# EAGLE board wings20 (EAGLE 6.4)

Size 100 x 80 mm. Coordinates in mm from the lower left corner, seen from the top.
Outline: 0,0 100,0 100,80 0,80 0,0
Copper layers (1*16): Top 0.035mm / dielectric 1.5mm / Bottom 0.035mm
Design rules "default": minimum track width 10mil, minimum drill 24mil, track to track 8mil, track to pad 8mil, pad to pad 8mil, via to via 8mil, smd to smd 8mil, copper to edge 40mil, drill to drill 8mil, minimum pad ring 10mil, minimum via ring 8mil, stop-mask expansion 4mil, vias tented up to drill 0mil, thermal gap 10mil

## Footprints (pad centres in the part's own frame; a part is rotated, then mirrored left to right if it is on the bottom)
1X04-3.5MM = drill 1 pad 2.184: 1 -5.25,0; 2 -1.75,0; 3 1.75,0; 4 5.25,0
1X2-3.5MM = drill 1 pad 2.184: 1 1.8,0; 2 -1.7,0
1X06-3.5MM = drill 1 pad 2.184: 1 -8.75,0; 2 -5.25,0; 3 -1.75,0; 4 1.75,0; 5 5.25,0; 6 8.75,0
1X06-CLEANBIG = drill 1.016 pad 1.778 octagon: 1 -6.35,0; 2 -3.81,0; 3 -1.27,0; 4 1.27,0; 5 3.81,0; 6 6.35,0
1X08-CLEANBIG = drill 1.016 pad 1.778 octagon: 1 -8.89,0; 2 -6.35,0; 3 -3.81,0; 4 -1.27,0; 5 1.27,0; 6 3.81,0; 7 6.35,0; 8 8.89,0
1X08-3.5MM = drill 1 pad 2.184: 1 -12.25,0; 2 -8.75,0; 3 -5.25,0; 4 -1.75,0; 5 1.75,0; 6 5.25,0; 7 8.75,0; 8 12.25,0
1X01 = drill 1.016 pad 1.93 octagon: 1 0,0
LED3MM = drill 0.813 pad 1.676 octagon: A -1.27,0; K 1.27,0
0207/10 = drill 0.813 pad 1.676 octagon: 1 -5.08,0; 2 5.08,0
B3F-10XX = drill 1.016 long: 1 -3.251,2.261; 2 3.251,2.261; 3 -3.251,-2.261; 4 3.251,-2.261
ARDUINO-BPLACE = drill 1 pad 1.676 octagon: 3V 35.56,2.54; 5V 38.1,2.54; A0 50.8,2.54; A1 53.34,2.54; A2 55.88,2.54; A3 58.42,2.54; A4 60.96,2.54; A5 63.5,2.54; AREF 23.876,50.8; D0 63.5,50.8; D1 60.96,50.8; D2 58.42,50.8; D3 55.88,50.8; D4 53.34,50.8; D5 50.8,50.8; D6 48.26,50.8; D7 45.72,50.8; D8 41.656,50.8; D9 39.116,50.8; D10 36.576,50.8; D11 34.036,50.8; D12 31.496,50.8; D13 28.956,50.8; GND 26.416,50.8; GND1 43.18,2.54; GND2 40.64,2.54; RESET 33.02,2.54; VIN 45.72,2.54 | hole 3.2: 15.24,50.8; 66.04,35.56; 13.97,2.54

## Placement (x,y rotation side)
CN1  1X4-3.5MM  [1X04-3.5MM]  -71.12,73.66 0 top  (outside the outline)
J1  1X2-3.5MM  [1X2-3.5MM]  -82.55,69.85 0 top  (outside the outline)
JP1  [1X06-3.5MM]  36.83,35.56 0 top
JP2  [1X06-CLEANBIG]  -20.32,88.9 0 top  (outside the outline)
JP3  [1X08-CLEANBIG]  -54.61,78.74 0 top  (outside the outline)
JP4  [1X08-CLEANBIG]  -76.2,78.74 0 top  (outside the outline)
JP5  [1X08-3.5MM]  -27.94,62.23 0 top  (outside the outline)
JP6  [1X08-3.5MM]  -57.15,62.23 0 top  (outside the outline)
JP7  [1X08-3.5MM]  -27.94,73.66 0 top  (outside the outline)
JP8  [1X06-CLEANBIG]  -36.83,88.9 0 top  (outside the outline)
JP9  [1X01]  -26.67,78.74 0 top  (outside the outline)
LED  [LED3MM]  -90.17,88.9 0 top  (outside the outline)
POWER  [LED3MM]  -81.28,88.9 0 top  (outside the outline)
R1  [0207/10]  -52.07,88.9 0 top  (outside the outline)
R2  [0207/10]  -64.77,88.9 0 top  (outside the outline)
RESET  [B3F-10XX]  -19.05,81.28 0 top  (outside the outline)
U$1  ARDUINO-BPLACE  [ARDUINO-BPLACE]  -81.28,1.27 0 top  (outside the outline)
W  [1X01]  -30.48,78.74 0 top  (outside the outline)
X  [1X01]  -34.29,78.74 0 top  (outside the outline)
Y  [1X01]  -38.1,78.74 0 top  (outside the outline)
Z  [1X01]  -41.91,78.74 0 top  (outside the outline)

## Library data of the parts
CN1 J1 JP1-JP9 LED POWER R1 R2 U$1 W X Y Z = adafruit
RESET = switch-omron

## Nets
3V: JP1.2 JP8.5 U$1.3V
GND: J1.1 J1.2 JP1.4 JP1.5 JP4.2 JP6.7 JP7.7 JP7.8 JP8.2 JP8.3 R1.1 R2.1 RESET.3 RESET.4 U$1.GND U$1.GND1 U$1.GND2
N$1: JP3.1 JP5.8 U$1.D7
N$2: JP3.2 JP5.7 U$1.D6
N$3: JP3.3 JP5.6 U$1.D5
N$4: JP3.4 JP5.5 U$1.D4
N$5: JP3.5 JP5.4 U$1.D3
N$6: JP3.6 JP5.3 U$1.D2
N$7: JP3.7 JP5.2 U$1.D1
N$8: JP3.8 JP5.1 U$1.D0
N$9: JP4.1 JP6.8 U$1.AREF
N$10: LED.K R1.2
N$11: JP4.3 JP6.6 U$1.D13
N$12: JP4.4 JP6.5 U$1.D12
N$13: JP4.5 JP6.4 U$1.D11
N$14: JP4.6 JP6.3 U$1.D10
N$15: JP4.7 JP6.2 U$1.D9
N$16: JP4.8 JP6.1 U$1.D8
N$17: JP2.1 JP7.6 U$1.A5
N$18: JP2.2 JP7.5 U$1.A4
N$19: JP2.3 JP7.4 U$1.A3
N$20: JP2.4 JP7.3 U$1.A2
N$21: JP2.5 JP7.2 U$1.A1
N$22: JP2.6 JP7.1 U$1.A0
N$26: POWER.K R2.2
N$27: JP9.1 LED.A
N$29: CN1.4 Z.1
N$30: JP1.1 JP8.6 RESET.1 RESET.2 U$1.RESET
N$33: CN1.3 Y.1
N$34: CN1.2 X.1
N$35: CN1.1 W.1
VCC: JP1.3 JP8.4 POWER.A U$1.5V
VIN: JP1.6 JP8.1 U$1.VIN

## Tracks (layer width: path | path; a pad name or v marks a point on that pad's centre or on a via)
3V  (2 unrouted)
GND  (16 unrouted)
N$1  (2 unrouted)
N$2  (2 unrouted)
N$3  (2 unrouted)
N$4  (2 unrouted)
N$5  (2 unrouted)
N$6  (2 unrouted)
N$7  (2 unrouted)
N$8  (2 unrouted)
N$9  (2 unrouted)
N$10  (1 unrouted)
N$11  (2 unrouted)
N$12  (2 unrouted)
N$13  (2 unrouted)
N$14  (2 unrouted)
N$15  (2 unrouted)
N$16  (2 unrouted)
N$17  (2 unrouted)
N$18  (2 unrouted)
N$19  (2 unrouted)
N$20  (2 unrouted)
N$21  (2 unrouted)
N$22  (2 unrouted)
N$26  (1 unrouted)
N$27  (1 unrouted)
N$29  (1 unrouted)
N$30  (4 unrouted)
N$33  (1 unrouted)
N$34  (1 unrouted)
N$35  (1 unrouted)
VCC  (3 unrouted)
VIN  (2 unrouted)